# EAGLE board sim800L_5 (EAGLE 9.2.0)
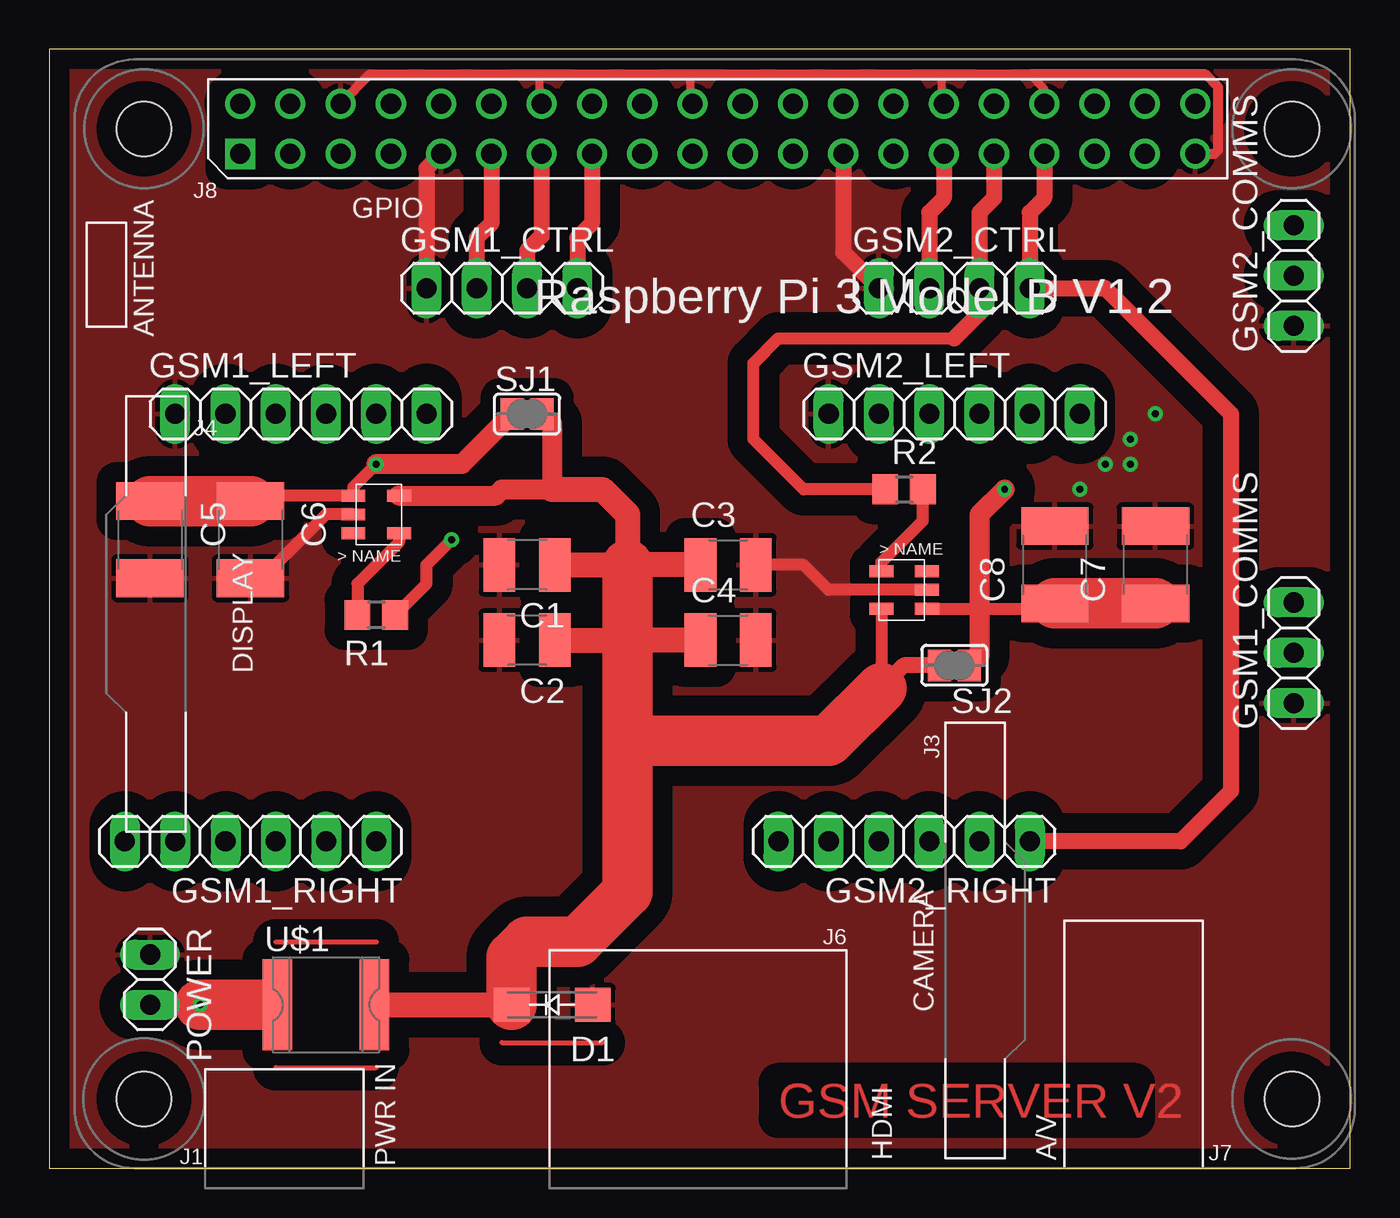
[diagram p0: board, top side]
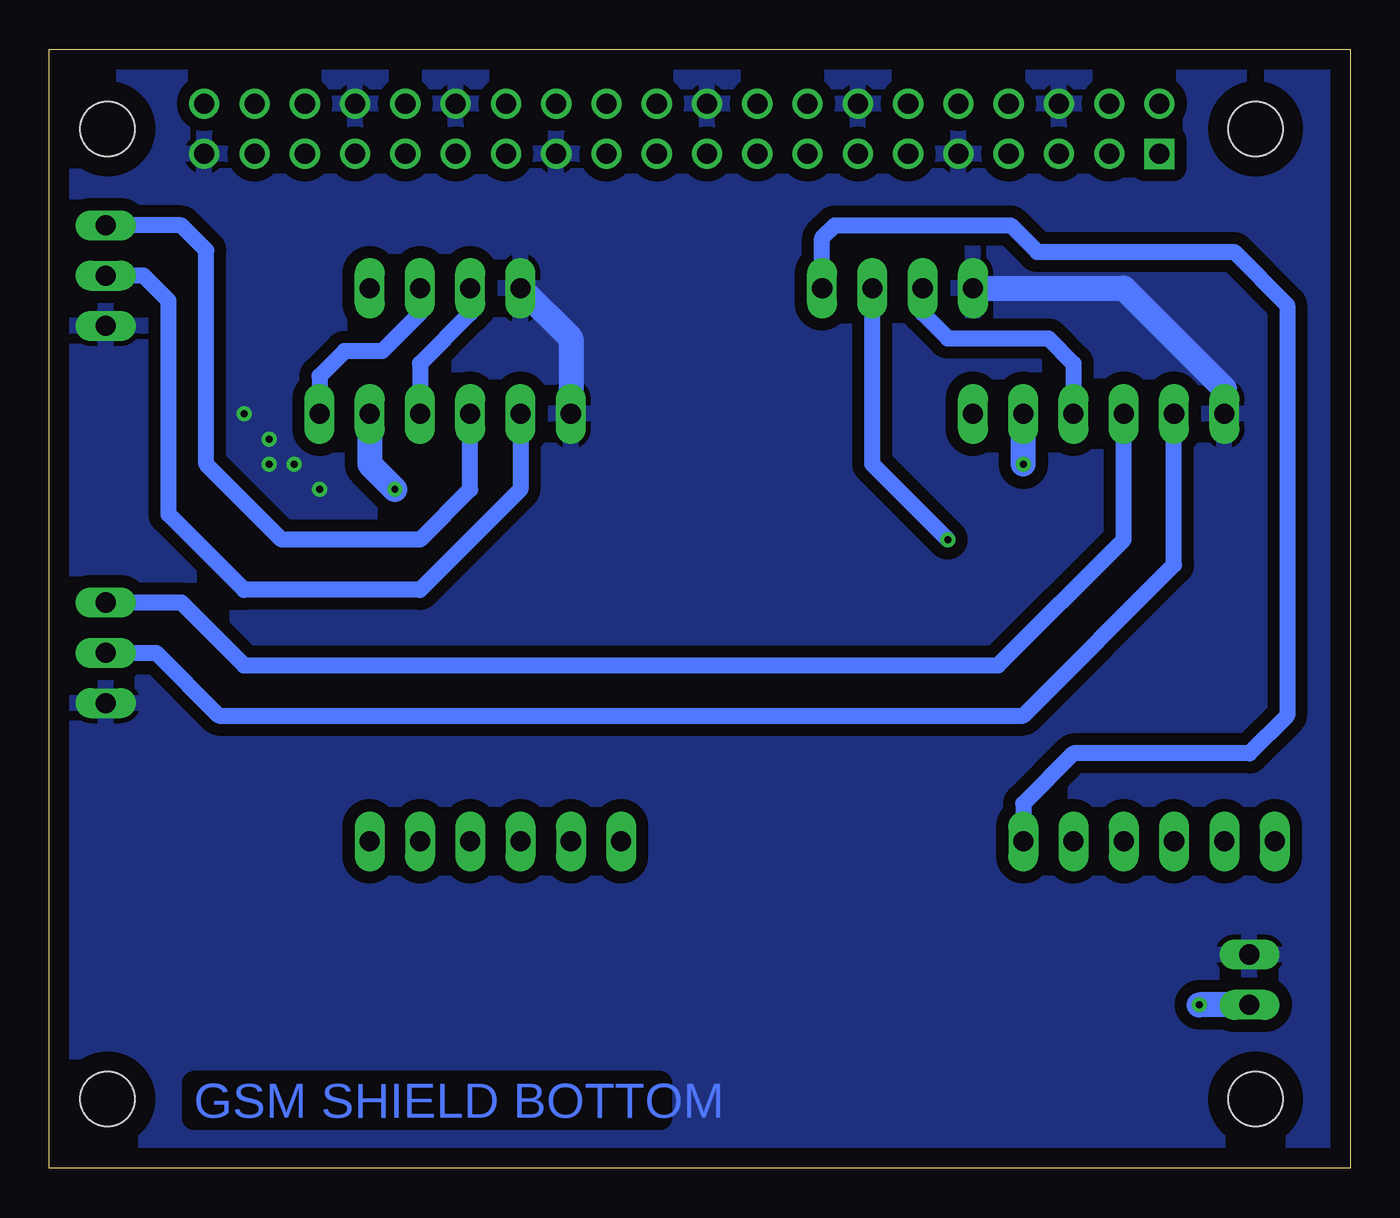
[diagram p1: board, bottom side, seen from below]

Size 65.71 x 56.51 mm. Coordinates in mm from the lower left corner, seen from the top.
Outline: 0,0 65.71,0 65.71,56.51 0,56.51 0,0
Copper layers (1*16): Top 0.035mm / dielectric 1.5mm / Bottom 0.035mm
Design rules "default": minimum track width 6mil, minimum drill 0.35mm, track to track 6mil, track to pad 6mil, pad to pad 6mil, via to via 6mil, smd to smd 6mil, copper to edge 40mil, drill to drill 6mil, minimum pad ring 10mil, minimum via ring 8mil, stop-mask expansion 4mil, vias tented up to drill 0mil, thermal gap 10mil

## Footprints (pad centres in the part's own frame; a part is rotated, then mirrored left to right if it is on the bottom)
C1210 = smd 1.6 x 2.7: 1 -1.4,0; 2 1.4,0
C4532 = smd 1.9 x 3.4: 1 -1.95,0; 2 1.95,0
SMA-DO214AC = smd 1.8 x 1.7: A -2.05,0; K 2.05,0
1X03 = drill 1.016 long: 1 -2.54,0; 2 0,0; 3 2.54,0
1X04 = drill 1.016 long: 1 -3.81,0; 2 -1.27,0; 3 1.27,0; 4 3.81,0
1X06 = drill 1.016 long: 1 -6.35,0; 2 -3.81,0; 3 -1.27,0; 4 1.27,0; 5 3.81,0; 6 6.35,0
1X02 = drill 1.016 long: 1 -1.27,0; 2 1.27,0
R0805 = smd 1.3 x 1.5: 1 -0.95,0; 2 0.95,0
SJ = smd 1.168 x 1.6: 1 -0.762,0; 2 0.762,0
MF-SMDF050 = smd 1.5 x 4.6: 1 -2.45,0; 2 2.45,0
RPI3_SHIELD = drill 1.016 square: P$1 8.37,51.23 | drill 1.016: P$2 8.357,53.772; P$3 10.897,51.232; P$4 10.897,53.772; P$5 13.437,51.232; P$6 13.437,53.772; P$7 15.977,51.232; P$8 15.977,53.772; P$9 18.517,51.232; P$10 18.517,53.772; P$11 21.057,51.232; P$12 21.057,53.772; P$13 23.597,51.232; P$14 23.597,53.772; P$15 26.137,51.232; P$16 26.137,53.772; P$17 28.677,51.232; P$18 28.677,53.772; P$19 31.217,51.232; P$20 31.217,53.772; P$21 33.757,51.232; P$22 33.757,53.772; P$23 36.297,51.232; P$24 36.297,53.772; P$25 38.837,51.232; P$26 38.837,53.772; P$27 41.377,51.232; P$28 41.377,53.772; P$29 43.917,51.232; P$30 43.917,53.772; P$31 46.457,51.232; P$32 46.457,53.772; P$33 48.997,51.232; P$34 48.997,53.772; P$35 51.537,51.232; P$36 51.537,53.772; P$37 54.077,51.232; P$38 54.077,53.772; P$39 56.617,51.232; P$40 56.617,53.772 | hole 2.75: 3.5,3.5; 61.5,3.5; 3.5,52.5; 61.5,52.5
SOT23-5L = smd 0.6 x 1.2: 1 0.95,1.15; 2 0,1.15; 3 -0.95,1.15; 4 -0.95,-1.15; 5 0.95,-1.15

## Placement (x,y rotation side)
C1  [C1210]  24.13,30.48 180 top
C2  [C1210]  24.13,26.67 180 top
C3  [C1210]  34.29,30.48 0 top
C4  [C1210]  34.29,26.67 0 top
C5  [C4532]  5.08,31.75 270 top
C6  [C4532]  10.16,31.75 270 top
C7  [C4532]  55.88,30.48 90 top
C8  [C4532]  50.8,30.48 90 top
D1  GF1  [SMA-DO214AC]  25.4,8.26 180 top
GSM1_COMMS  [1X03]  62.87,26.04 90 top
GSM1_CTRL  [1X04]  22.86,44.45 0 top
GSM1_LEFT  [1X06]  12.7,38.1 0 top
GSM1_RIGHT  [1X06]  10.16,16.51 180 top
GSM2_COMMS  [1X03]  62.87,45.09 90 top
GSM2_CTRL  [1X04]  45.72,44.45 0 top
GSM2_LEFT  [1X06]  45.72,38.1 0 top
GSM2_RIGHT  [1X06]  43.18,16.51 180 top
POWER  [1X02]  5.08,9.53 270 top
R1  [R0805]  16.51,27.94 180 top
R2  [R0805]  43.18,34.29 0 top
SJ1  [SJ]  24.13,38.1 0 top
SJ2  [SJ]  45.72,25.4 180 top
U$1  MF-SMDF050  [MF-SMDF050]  13.97,8.26 0 top
U$2  RPI3_SHIELD  [RPI3_SHIELD]  1.27,0 0 top
U$3  STMPS2161STR  [SOT23-5L]  43.18,29.21 270 top
U$4  STMPS2161STR  [SOT23-5L]  16.51,33.02 90 top

## Library data of the parts
C1-C8 = rcl; SPICEPREFIX: C
D1 = diode
GSM1_COMMS GSM1_CTRL GSM1_LEFT GSM1_RIGHT GSM2_COMMS GSM2_CTRL GSM2_LEFT GSM2_RIGHT POWER = pinhead
R1 R2 = rcl; SPICEPREFIX: R
SJ1 SJ2 = jumper
U$1 = fuse
U$2 = e14_Rpi3_RevA
U$3 U$4 = stmicro

## Nets
DTR: GSM1_RIGHT.2
DTR2: GSM2_RIGHT.2
GND: C1.2 C2.2 C3.2 C4.2 C5.2 C6.2 C7.2 C8.2 D1.A GSM1_COMMS.1 GSM1_CTRL.1 GSM1_LEFT.1 GSM2_COMMS.1 GSM2_CTRL.1 GSM2_LEFT.1 POWER.1 U$2.P$6 U$2.P$9 U$2.P$14 U$2.P$20 U$2.P$25 U$2.P$30 U$2.P$34 U$2.P$39 U$3.2 U$4.2
MICN: GSM1_RIGHT.4
MICN2: GSM2_RIGHT.4
MICP: GSM1_RIGHT.3
MICP2: GSM2_RIGHT.3
N$1: POWER.2 U$1.1
N$2: R1.2 U$4.4
N$3: R2.2 U$3.4
N$4: U$4.3
N$9: U$3.3
NET: GSM1_LEFT.6
NET2: GSM2_LEFT.6
PWR: GSM1_CTRL.3 R1.1 U$2.P$13
PWR2: GSM2_CTRL.3 R2.1 U$2.P$31
RING: GSM1_CTRL.4 GSM1_RIGHT.1 U$2.P$15
RING2: GSM2_CTRL.4 GSM2_RIGHT.1 U$2.P$33
RST: GSM1_CTRL.2 GSM1_LEFT.4 U$2.P$11
RST2: GSM2_CTRL.2 GSM2_LEFT.4 U$2.P$29
RXD: GSM1_COMMS.3 GSM1_LEFT.3
RXD2: GSM2_COMMS.3 GSM2_LEFT.3
SPKN: GSM1_RIGHT.6
SPKN2: GSM2_RIGHT.6
SPKP: GSM1_RIGHT.5
SPKP2: GSM2_RIGHT.5
TXD: GSM1_COMMS.2 GSM1_LEFT.2
TXD2: GSM2_COMMS.2 GSM2_LEFT.2
VCC: C1.1 C2.1 C3.1 C4.1 D1.K SJ1.2 SJ2.2 U$1.2 U$3.5 U$4.5
VCC_1: C5.1 C6.1 GSM1_LEFT.5 SJ1.1 U$4.1
VCC_2: C7.1 C8.1 GSM2_LEFT.5 SJ2.1 U$3.1

## Tracks (layer width: path | path; a pad name or v marks a point on that pad's centre or on a via)
GND  (via drill 0.35)
  Top 0.406: U$2.P$34 50.27,54.51 49.53,55.24 | U$2.P$30 45.09,53.87 45.09,55.24 | U$2.P$20 32.38,53.87 32.38,55.24 | U$2.P$14 24.77,53.87 24.77,55.24
  Top 0.508: U$2.P$6 16.18,55.24 24.77,55.24 32.38,55.24 45.09,55.24 49.53,55.24 58.42,55.24 59.05,54.61 59.05,51.44 58.85,51.23 U$2.P$39
  Top 0.61: U$4.2 13.97,33.02 10.75,29.8 C6.2 | U$3.2 39.37,29.21 38.1,30.48 C3.2
  Top 0.813: U$2.P$9 19.05,50.49 GSM1_CTRL.1 | U$2.P$25 40.11,46.25 GSM2_CTRL.1
  Bottom 1.27: GSM1_CTRL.1 11.43,44.45 6.35,39.37 GSM1_LEFT.1 | GSM2_CTRL.1 39.37,41.91 GSM2_LEFT.1
  other vias: 54.61,35.56 54.61,36.83 53.34,35.56 52.07,34.29 55.88,38.1
  pour Bottom (isolate 0.61, rank 6): 0,57.78 66.04,57.78 66.04,0 0,0
  pour Top (isolate 1.016): 0,56.52 66.04,56.52 66.04,0 0,0
N$1  (via drill 0.35)
  Top 1.27: 10.79,8.26 U$1.1
  Top 2.54: v7.62,8.26 10.79,8.26
  Bottom 1.27: POWER.2 v7.62,8.26
N$2
  Top 0.61: U$4.4 17.66,31.63 15.56,29.53 R1.2
N$3
  Top 0.61: U$3.4 42.03,30.6 44.13,32.7 R2.2
N$5
  Top 0.254: 11.43,11.43 16.51,11.43
N$6
  Top 0.254: 11.43,5.08 16.51,5.08
N$7
  Top 0.254: 22.86,6.35 27.94,6.35
NET2
  Bottom 0.813: 46.99,43.18 48.9,41.27 50.8,41.27 52.07,40.01 GSM2_LEFT.6
PWR  (via drill 0.35)
  Top 0.61: R1.1 19.05,29.53 19.05,30.48 v20.32,31.75
  Top 0.813: U$2.P$13 24.87,47.09 24.13,46.35 GSM1_CTRL.3
  Bottom 0.813: v20.32,31.75 24.13,35.56 GSM1_CTRL.3
PWR2
  Top 0.61: R2.1 38.1,34.29 35.56,36.83 35.56,40.64 36.83,41.91 45.72,41.91
  Top 0.813: U$2.P$31 47.73,49 46.99,48.26 GSM2_CTRL.3 46.99,43.18 45.72,41.91
RING
  Top 0.813: U$2.P$15 27.41,47.73 26.67,46.99 GSM1_CTRL.4
  Bottom 0.813: GSM1_CTRL.4 26.67,46.99 26.04,47.62 17.14,47.62 15.8,46.28 5.86,46.28 3.17,43.6 3.17,22.86 5.08,20.95 13.97,20.95 16.51,18.41 GSM1_RIGHT.1
RING2
  Top 0.813: U$2.P$33 50.27,49 49.53,48.26 GSM2_CTRL.4 53.34,44.45 59.69,38.1 59.69,19.05 57.15,16.51 GSM2_RIGHT.1
RST
  Top 0.813: U$2.P$11 22.33,47.73 21.59,46.99 GSM1_CTRL.2
  Bottom 0.813: GSM1_CTRL.2 21.59,43.18 20.32,41.91 15.24,41.91 13.97,40.64 GSM1_LEFT.4
RST2
  Top 0.813: U$2.P$29 45.19,49 44.45,48.26 GSM2_CTRL.2
  Bottom 0.813: GSM2_CTRL.2 44.45,43.18 46.99,40.64 GSM2_LEFT.4
RXD
  Bottom 0.813: GSM1_LEFT.3 11.43,31.75 17.78,25.4 55.88,25.4 59.05,28.57 GSM1_COMMS.3
RXD2
  Bottom 0.813: GSM2_LEFT.3 44.45,34.29 46.99,31.75 53.98,31.75 57.78,35.56 57.78,46.35 59.05,47.62 GSM2_COMMS.3
TXD
  Bottom 0.813: GSM1_LEFT.2 8.89,30.48 16.51,22.86 57.15,22.86 60.33,26.04 GSM1_COMMS.2
TXD2
  Bottom 0.813: GSM2_LEFT.2 41.91,34.29 46.99,29.21 55.88,29.21 59.69,33.02 59.69,43.81 60.96,45.09 GSM2_COMMS.2
VCC
  Top 0.61: C1.1 25.4,30.61 | U$3.5 42.03,24.25
  Top 0.813: SJ2.2 43.18,25.4 42.03,24.25
  Top 1.016: U$4.5 22.54,33.97 22.86,34.29 25.4,34.29 25.4,37.59 SJ1.2
  Top 1.27: U$1.2 D1.K | C1.1 29.21,30.48 | C3.1 29.21,30.48 | C2.1 29.21,26.67 C4.1 | 29.21,30.48 29.21,33.02 27.94,34.29 25.4,34.29
  Top 2.54: D1.K 23.35,10.65 24.13,11.43 26.67,11.43 29.21,13.97 29.21,21.59 | 29.21,30.48 29.21,26.67 29.21,21.59 | 42.03,24.25 39.37,21.59 29.21,21.59
VCC_1  (via drill 0.35)
  Top 0.61: C6.1 10.43,33.97 U$4.1 15.36,34.41 v16.51,35.56
  Top 1.016: SJ1.1 20.83,35.56 v16.51,35.56
  Top 2.54: C5.1 C6.1
  Bottom 1.27: v16.51,35.56 GSM1_LEFT.5
VCC_2  (via drill 0.35)
  Top 0.61: U$3.1 46.99,28.26 50.53,28.26 C8.1
  Top 1.016: v48.26,34.29 46.99,33.02 46.99,28.26 46.99,25.91 SJ2.1
  Top 2.54: C8.1 C7.1
  Bottom 1.27: GSM2_LEFT.5 49.53,35.56 v48.26,34.29

## Text on the board
Top: GSM SERVER V2
Bottom: GSM SHIELD BOTTOM